# Altium PCB UV_Watch_1.PcbDoc (part 2 of 2)
Units mil, origin at the board's own origin, x right, y up, seen from the top; angles counter-clockwise.
Board outline 1500 x 1500 mil, 2 copper layers (Top Layer, Bottom Layer), stack 12.8 mil thick; 84 components, 41 nets, 258 pads, 64 vias.
Unrouted connection lines stored in the file: 1.
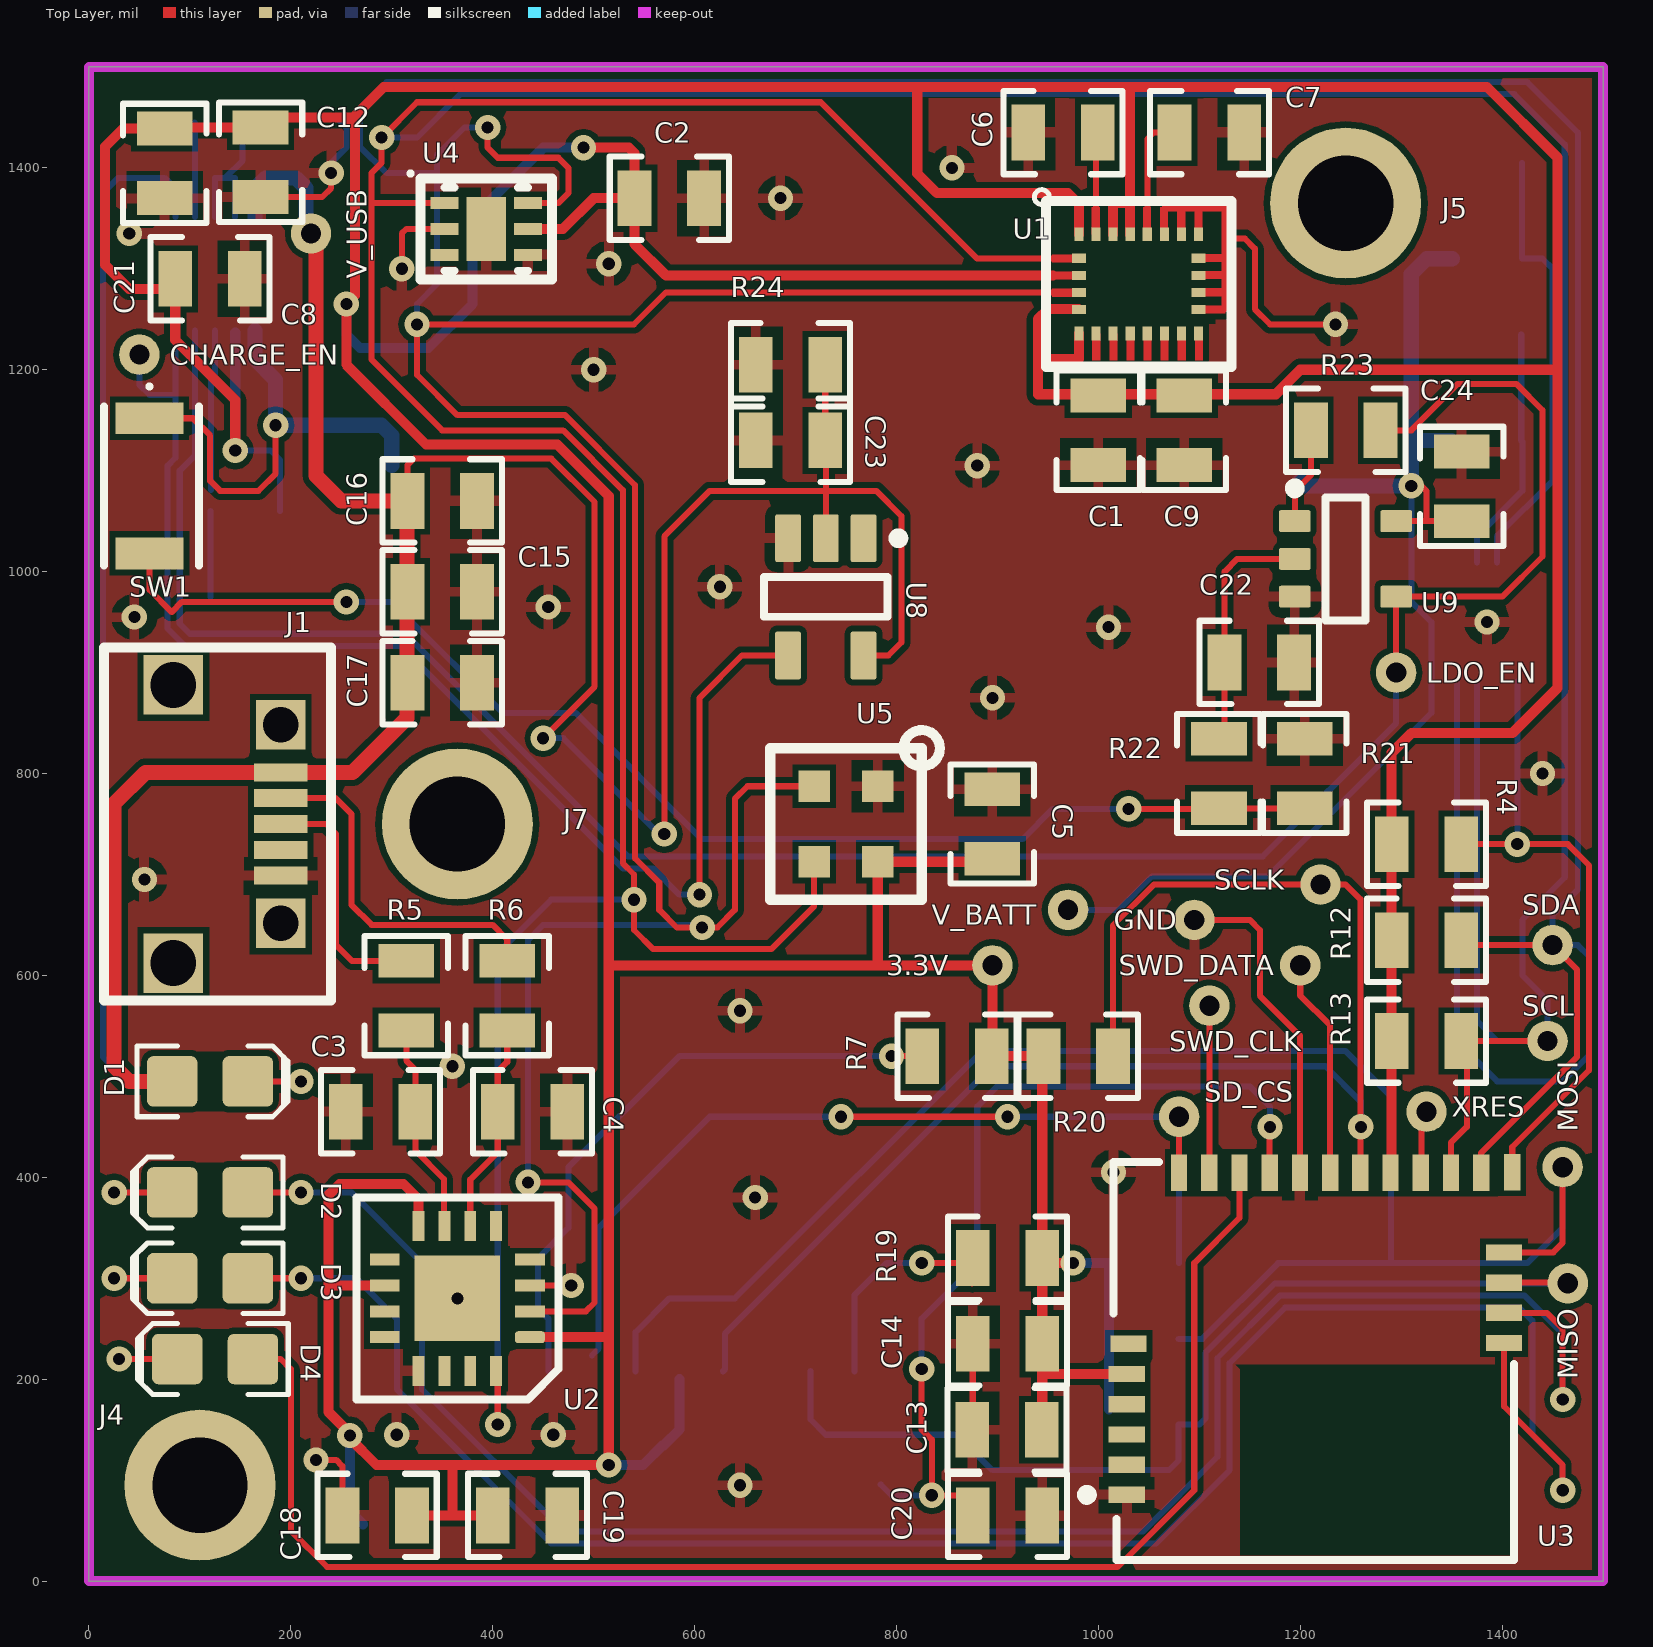
[diagram p0: Top Layer view]

## Part data (continued)
SW1: Contact Current Rating=50mA, Contact Resistance=100mR, Insulation Resistance=100MR, IP Rating="IP40,Dust Proof", Manufacturer=Omron, Manufacturer Part Number=B3U-3000P, Max Operating Temperature=70°C, Max Voltage Rating (DC)=12V, Min Operating Temperature=-25°C, Operating Force=1.59N, Package Quantity=1, Supplier Part Number 1=653-B3U-3000P, Actuator Length=0.7mm, ComponentLink1Description=https://datasheet.ciiva.com/1634/60838-1634400.pdf, ComponentLink1URL=https://datasheet.ciiva.com/1634/60838-1634400.pdf, ComponentLink2Description=https://datasheet.ciiva.com/2900/b3u-1110-2900035.pdf, ComponentLink2URL=https://datasheet.ciiva.com/2900/b3u-1110-2900035.pdf, ComponentLink3Description=https://datasheet.ciiva.com/2900/b3u-1110-2900036.pdf, ComponentLink3URL=https://datasheet.ciiva.com/2900/b3u-1110-2900036.pdf, ComponentLink4Description=https://datasheet.ciiva.com/2900/b3u-1110-2900037.pdf, ComponentLink4URL=https://datasheet.ciiva.com/2900/b3u-1110-2900037.pdf, ComponentLink5Description=https://datasheet.ciiva.com/1532/60838-1532682.pdf, ComponentLink5URL=https://datasheet.ciiva.com/1532/60838-1532682.pdf, ComponentLink6Description=https://datasheet.ciiva.com/16863/70176037-16863994.pdf, ComponentLink6URL=https://datasheet.ciiva.com/16863/70176037-16863994.pdf, ComponentLink7Description=https://datasheet.ciiva.com/14142/b3u-eng-datasheet-14142542.pdf, ComponentLink7URL=https://datasheet.ciiva.com/14142/b3u-eng-datasheet-14142542.pdf, ComponentLink8Description=https://datasheet.ciiva.com/30158/en-b3u-30158606.pdf, ComponentLink8URL=https://datasheet.ciiva.com/30158/en-b3u-30158606.pdf, Contact Material=Silver, Current Rating=50mA, Depth=3.2mm, Description 1="OMRON ELECTRONIC COMPONENTS         B3U-3000P            Tactile Switch, Non Illuminated, 1.59 N, 12 V, 50 mA, Solder, B3U Series", Electrical Life=100000Cycles, Illumination Type=Non-Illuminated,Illuminated, Lead Free="Lead Free", Length=4mm, Max Current Rating=50mA, Mechanical Life=100000Cycles, Mount="Surface Mount", Orientation="Right Angle", Packaging="Tape and Reel", Pricing 1="1=0.97, 10=0.961, 50=0.798, 100=0.725, 1000=0.526, 10000=0.445 (USD)", REACH SVHC=Unknown, Stock 1=4217, Supplier 1=Mouser, Switch Function=Off-Mom, Switch Travel=0.2mm, Termination=SMD/SMT, Throw Configuration=SPST, Voltage Rating (DC)=12V, Weight=0.022g
U1: Case/Package=LGA, Manufacturer=STMicroelectronics, Manufacturer Part Number=LSM9DS1TR, Max Operating Temperature=85°C, Max Supply Voltage=3.6V, Min Operating Temperature=-40°C, Min Supply Voltage=1.9V, Supplier Part Number 1=511-LSM9DS1TR, ComponentLink1Description=http://www.farnell.com/datasheets/2028150.pdf, ComponentLink1URL=http://www.farnell.com/datasheets/2028150.pdf, ComponentLink2Description=http://www.st.com/content/ccc/resource/technical/document/datasheet/1e/3f/2a/d6/25/eb/48/46/DM00103319.pdf/files/DM00103319.pdf/jcr:content/translations/en.DM00103319.pdf, ComponentLink2URL=http://www.st.com/content/ccc/resource/technical/document/datasheet/1e/3f/2a/d6/25/eb/48/46/DM00103319.pdf/files/DM00103319.pdf/jcr:content/translations/en.DM00103319.pdf, ComponentLink3Description=https://www.mouser.com/ds/2/389/lsm9ds1-955071.pdf, ComponentLink3URL=https://www.mouser.com/ds/2/389/lsm9ds1-955071.pdf, Description 1="STMICROELECTRONICS         LSM9DS1TR             MEMS Module, I2C/SPI, Tri-Axis Gyroscope, Tri-Axis Accelerometer, Tri-Axis Magnetometer, 1.9 V", Lead Free="Lead Free", Number of Pins=24, Output Type=SPI,I2C, Packaging="Cut Tape", Pricing 1="1=6.14, 10=5.55, 50=5.3, 100=4.6, 1000=3.49, 10000=3.1 (USD)", REACH SVHC="No SVHC", Sensor Type="Accelerometer,Gyroscope,Magnetometer,3 Axis", Stock 1=5520, Supplier 1=Mouser
U2: "USB to I2C Interface Chip, UHCI/OHCI/EHCI Compatible, USB 2.0 Compatible, -40 to +85 degC, 16-Pin QFN, Pb-Free, Tape and Reel", Case/Package=QFN, Manufacturer=FTDI, Max Operating Temperature=85°C, Min Operating Temperature=-40°C, Operating Supply Current=8mA, Operating Supply Voltage=5.5V, Package Quantity=5000, Supplier Part Number 1=768-1131-1-ND, ComponentLink1Description=https://datasheet.ciiva.com/14668/0900766b811020ab-14668386.pdf, ComponentLink1URL=https://datasheet.ciiva.com/14668/0900766b811020ab-14668386.pdf, ComponentLink2Description=https://datasheet.ciiva.com/1784/ft-x-series-1784572.pdf, ComponentLink2URL=https://datasheet.ciiva.com/1784/ft-x-series-1784572.pdf, ComponentLink3Description=https://datasheet.ciiva.com/1784/ft-x-series-1784573.pdf, ComponentLink3URL=https://datasheet.ciiva.com/1784/ft-x-series-1784573.pdf, ComponentLink4Description=https://datasheet.ciiva.com/1784/ft-x-series-1784574.pdf, ComponentLink4URL=https://datasheet.ciiva.com/1784/ft-x-series-1784574.pdf, Data Rate=12Mbps, Description 1="IC USB FS I2C 16QFN", Height=0.75mm, Interface=I2C,USB, Lead Free="Lead Free", Length=4mm, Manufacturer Part Number=FT201XQ-R, Mount="Surface Mount", Number of Pins=16, Packaging="Tape and Reel", Pricing 1="1=2.04, 25=1.97, 100=1.9, 250=1.71, 500=1.54, 1000=1.4806 (USD)", Stock 1=2248, Supplier 1=Digi-Key, Weight=0.002014oz, Width=4mm
U3: Case/Package=SMD/SMT, Current - Receiving=16.4mA, Current - Transmitting=15.6mA, Frequency=2.4GHz, Manufacturer=Cypress, Max Operating Temperature=85°C, Min Operating Temperature=-40°C, Operating Supply Voltage=5.5V, Supplier Part Number 1=428-3583-1-ND, ComponentLink1Description=http://www.cypress.com/file/230691/download, ComponentLink1URL=http://www.cypress.com/file/230691/download, Data Rate=1Mbps, Description 1="Bluetooth Class II 1.8V to 5.5V 1000Kbps 22-Pin SMD T/R", Interface=I2C,SPI,UART, Manufacturer Part Number=CYBLE-222014-01, Memory Size=32KB, Mount="Surface Mount", Packaging="Tape and Reel", Pricing 1="1=14.77, 10=13.367, 25=12.3112, 100=11.256, 250=10.5525 (USD)", Sensitivity=-91dBm, Stock 1=1017, Supplier 1=Digi-Key
U4: Manufacturer="Texas Instruments", Manufacturer Part Number=TMP116AIDRVT, Max Operating Temperature=150°C, Min Operating Temperature=-55°C, Supplier Part Number 1=296-46944-1-ND, Interface=I2C,SMBus,2-Wire, Pricing 1="1=4.01, 10=3.599, 100=2.9485 (USD)", Stock 1=995, Supplier 1=Digi-Key
U6: Case/Package="DFN EP", Manufacturer="Analog Devices / Linear Technology", Manufacturer Part Number=LTC4063EDD#PBF, Max Charge Current=1A, Max Input Voltage=8V, Max Operating Temperature=85°C, Min Input Voltage=4.3V, Min Operating Temperature=-40°C, Output Current=800uA, Output Voltage=4.2V, Package Quantity=121, Supplier Part Number 1=LTC4063EDD#PBF-ND, ComponentLink1Description=https://datasheet.ciiva.com/1139/1716146-1139992.pdf, ComponentLink1URL=https://datasheet.ciiva.com/1139/1716146-1139992.pdf, ComponentLink2Description=https://datasheet.ciiva.com/1145/79586-1145020.pdf, ComponentLink2URL=https://datasheet.ciiva.com/1145/79586-1145020.pdf, ComponentLink3Description=https://datasheet.ciiva.com/15114/getdatasheetpartid-366882-15114670.pdf, ComponentLink3URL=https://datasheet.ciiva.com/15114/getdatasheetpartid-366882-15114670.pdf, ComponentLink4Description=https://datasheet.ciiva.com/48696/001255656-da-01-en-ic-batt-chrgr-ltc4063edd-pbf-dfn-10-ltc-48696044.pdf, ComponentLink4URL=https://datasheet.ciiva.com/48696/001255656-da-01-en-ic-batt-chrgr-ltc4063edd-pbf-dfn-10-ltc-48696044.pdf, Description 1="LINEAR TECHNOLOGY         LTC4063EDD#PBF            IC, BATT CHARGER, W/MP LDO, 10DFN", Lead Free="Lead Free", Max Supply Voltage=8V, Min Supply Voltage=4.3V, Number of Cells=1, Number of Pins=10, Packaging=Rail/Tube, Pricing 1="1=4.36, 25=2.8928, 100=2.2848 (USD)", Radiation Hardening=No, REACH SVHC="No SVHC", Stock 1=576, Supplier 1=Digi-Key
U7: Manufacturer=Maxim, Manufacturer Part Number=MAX17043G+T, Max Operating Temperature=70°C, Min Operating Temperature=-20°C, Package Quantity=10000, Supplier Part Number 1=700-MAX17043G+T, ComponentLink1Description=https://datasheet.ciiva.com/1935/max17043-max17044-1935697.pdf, ComponentLink1URL=https://datasheet.ciiva.com/1935/max17043-max17044-1935697.pdf, Contact Plating=Tin,Matte, Description 1="IC 2-WIRE FG MODEL GAUGE LO BATT", Mount="Surface Mount", Number of Pins=8, Packaging="Tape and Reel", Pricing 1="1=3.67, 10=3.52, 50=1.85, 100=1.7, 1000=1.66, 10000=1.66 (USD)", Radiation Hardening=No, Stock 1=10717, Supplier 1=Mouser
U8: "SN74AHC1G04DBVR", Case/Package=SOT-23, High Level Output Current=-8mA, Low Level Output Current=8mA, Manufacturer="Texas Instruments", Max Operating Temperature=125°C, Max Supply Voltage=5.5V, Min Operating Temperature=-40°C, Min Supply Voltage=2V, Package Quantity=1, Quiescent Current=1uA, Supplier Part Number 1=595-SN74AHC1G04DBVR, ComponentLink1Description=https://datasheet.ciiva.com/4827/scls318q-100390-4827313.pdf, ComponentLink1URL=https://datasheet.ciiva.com/4827/scls318q-100390-4827313.pdf, ComponentLink2Description=https://datasheet.ciiva.com/1864/sn74ahc1g04-1864386.pdf, ComponentLink2URL=https://datasheet.ciiva.com/1864/sn74ahc1g04-1864386.pdf, ComponentLink3Description=https://datasheet.ciiva.com/14132/sn74ahc1g04-eng-tds-14132658.pdf, ComponentLink3URL=https://datasheet.ciiva.com/14132/sn74ahc1g04-eng-tds-14132658.pdf, ComponentLink4Description=https://datasheet.ciiva.com/1864/sn74ahc1g04-1864387.pdf, ComponentLink4URL=https://datasheet.ciiva.com/1864/sn74ahc1g04-1864387.pdf, ComponentLink5Description=https://datasheet.ciiva.com/1864/sn74ahc1g04-1864388.pdf, ComponentLink5URL=https://datasheet.ciiva.com/1864/sn74ahc1g04-1864388.pdf, ComponentLink6Description=https://datasheet.ciiva.com/15089/getdatasheetpartid-190014-15089365.pdf, ComponentLink6URL=https://datasheet.ciiva.com/15089/getdatasheetpartid-190014-15089365.pdf, ComponentLink7Description=https://datasheet.ciiva.com/46384/1882758-46384389.pdf, ComponentLink7URL=https://datasheet.ciiva.com/46384/1882758-46384389.pdf, ComponentLink8Description=https://datasheet.ciiva.com/46430/1834091-46430923.pdf, ComponentLink8URL=https://datasheet.ciiva.com/46430/1834091-46430923.pdf, ComponentLink9Description=https://datasheet.ciiva.com/4219/1511sn74ahc1g04-4219564.pdf, ComponentLink9URL=https://datasheet.ciiva.com/4219/1511sn74ahc1g04-4219564.pdf, ComponentLink10Description=https://datasheet.ciiva.com/7783/1759812-7783196.pdf, ComponentLink10URL=https://datasheet.ciiva.com/7783/1759812-7783196.pdf, ComponentLink11Description=https://datasheet.ciiva.com/16464/sn74ahc1g04-16464940.pdf, ComponentLink11URL=https://datasheet.ciiva.com/16464/sn74ahc1g04-16464940.pdf, ComponentLink12Description=https://datasheet.ciiva.com/7783/1759812-7783197.pdf, ComponentLink12URL=https://datasheet.ciiva.com/7783/1759812-7783197.pdf, ComponentLink13Description=https://datasheet.ciiva.com/27052/1384368-27052143.pdf, ComponentLink13URL=https://datasheet.ciiva.com/27052/1384368-27052143.pdf, ComponentLink14Description=https://datasheet.ciiva.com/48703/001074492-da-01-en-ic-single-i-sn74ahc1g04dbvr-sot-23-5-tid-48703786.pdf, ComponentLink14URL=https://datasheet.ciiva.com/48703/001074492-da-01-en-ic-single-i-sn74ahc1g04dbvr-sot-23-5-tid-48703786.pdf, Contact Plating=Tin,Matte, Description 1="IC SINGLE INVERTER GATE SOT23-5", Height=1.15mm, Lead Free="Lead Free", Length=2.9mm, Logic Function=Buffer,Inverter,Inverting, Manufacturer Part Number=SN74AHC1G04DBVR, Max Output Current=8mA, Mount="Surface Mount", Number of Bits=1, Number of Circuits=1, Number of Elements=1, Number of Gates=1, Number of Inputs=1, Number of Pins=5, Output Current=8mA, Packaging="Tape and Reel", Pricing 1="1=0.43, 10=0.289, 50=0.289, 100=0.137, 1000=0.106, 10000=0.08 (USD)", Propagation Delay=7.5ns, Radiation Hardening=No, REACH SVHC="No SVHC", Schmitt Trigger Input=No, Stock 1=27929, Supplier 1=Mouser, Termination=SMD/SMT, Turn-On Delay Time=12ns, Weight=0.000557oz, Width=1.6mm
U9: Case/Package=SOT-23, Frequency=280MHz, High Level Output Current=-4mA, Low Level Output Current=4mA, Manufacturer="Texas Instruments", Manufacturer Part Number=SN74AUP1G80DBVR, Max Operating Temperature=85°C, Max Supply Voltage=3.6V, Min Operating Temperature=-40°C, Min Supply Voltage=800mV, Package Quantity=3000, Supplier Part Number 1=595-SN74AUP1G80DBVR, Clock Edge Trigger Type="Positive Edge", ComponentLink1Description=https://datasheet.ciiva.com/15091/getdatasheetpartid-194395-15091600.pdf, ComponentLink1URL=https://datasheet.ciiva.com/15091/getdatasheetpartid-194395-15091600.pdf, ComponentLink2Description=https://datasheet.ciiva.com/1854/sn74aup1g80-1854806.pdf, ComponentLink2URL=https://datasheet.ciiva.com/1854/sn74aup1g80-1854806.pdf, ComponentLink3Description=https://datasheet.ciiva.com/1854/sn74aup1g80-1854807.pdf, ComponentLink3URL=https://datasheet.ciiva.com/1854/sn74aup1g80-1854807.pdf, ComponentLink4Description=https://datasheet.ciiva.com/1854/sn74aup1g80-1854808.pdf, ComponentLink4URL=https://datasheet.ciiva.com/1854/sn74aup1g80-1854808.pdf, ComponentLink5Description=https://datasheet.ciiva.com/14313/sces593e-14313482.pdf, ComponentLink5URL=https://datasheet.ciiva.com/14313/sces593e-14313482.pdf, ComponentLink6Description=https://datasheet.ciiva.com/14292/sn74aup1g80-14292862.pdf, ComponentLink6URL=https://datasheet.ciiva.com/14292/sn74aup1g80-14292862.pdf, Description 1="IC D-TYPE POS TRG SNGL SOT23-5", Lead Free="Lead Free", Logic Function=D-Type, Mount="Surface Mount", Number of Bits=1, Number of Bits per Element=1, Number of Circuits=1, Number of Elements=1, Number of Input Lines=1, Number of Output Lines=1, Number of Outputs=1, Number of Pins=5, Packaging="Tape and Reel", Polarity=Inverting, Pricing 1="1=0.35, 10=0.266, 50=0.266, 100=0.144, 1000=0.108, 10000=0.087 (USD)", Propagation Delay=17.7ns, Radiation Hardening=No, REACH SVHC="No SVHC", Stock 1=3731, Supplier 1=Mouser, Turn-On Delay Time=3.1ns, Weight=0.000395oz

## Via types
v1: diameter 25, hole 12, Top Layer to Bottom Layer, 64 vias

## Nets (pads, with @x,y where several pads share a name; then routed paths per layer and width w, separated by ;. In a path a pad name is that pad's centre, name@x,y a point inside that pad or via, vN(x,y) a via of type N, cw(c..) or ccw(c..) an arc to the next point about the centre after c; other vN are vias at no path point)
3.3V: 3.3V.1 C1.1 C2.1 C5.2 C8.1 C9.1 C12.1 C13.1 C14.1 C18.1 C19.2 C21.2 J3.4 J3.10 R4.1 R7.1 R8.1 R9.2 R12.2 R13.1 R14.1 R18.1 R19.1 R20.1 U1.1 U1.3 U1.5 U1.6 U1.22 U1.23 U2.1 U2.8 U2.10 U3.5 U3.14 U4.5 U5.4 U6.2 | length 9560.3
  Top Layer w6: 955,1293.46 U1.3
  Top Layer w10: v1(145,1120) 145,1170 85.55,1229.45 85.55,1280 40,1280 16,1304 16,1421 33.9,1438.9 C21.2 76.1,1440 C12.1 180,1450 258.5,1450 258.5,1446.5 ; U2.10 237.2,292.8 ; C18.1 360,65 ; U2.8 326.61,378.39 311.61,393.39 248.39,393.39 237.2,382.2 237.2,292.8 ; C19.2 360,65 ; U4.5 469.41,1339.41 500,1370 C2.1 ; U2.1 515,241.61 ; v1(490,1420) 535,1420 540.55,1414.45 C2.1 ; C5.2@885,715.55 882.05,712.6 U5.4 781.5,610 ; 940.75,1210.75 980.75,1210.75 U1.6 ; R19.1@943.9,295 944.45,294.45 C14.1 944.45,205 ; C13.1@944.45,155 944.45,205 ; 955,1293.46 571.54,1293.46 540.55,1324.45 C2.1 ; v1(975,315) 944.45,315 R19.1 944.45,518.9 R20.1 895,520 3.3V.1 781.5,610 ; U1.5@980.35,1260 950,1260 940,1250 940,1175.75 1175.75,1175.75 1200,1200 1455,1200 ; U1.1 980.75,1364.25 970,1375 840,1375 820.55,1394.45 820.55,1480 ; U1.23 1014.61,1364.61 1015,1365 1031.54,1365 ; U3.5 944.59,205.14 944.45,205 ; U1.22 1031.54,1365 ; U3.14 1290.55,405.69 R13.1 R12.2 R4.1 1290.55,820.55 1310,840 1410,840 1455,885 1455,1200 ; 237.2,292.8 237.2,167.8 258.5,146.5 v1(258.5,144.21) 258.5,141.5 285,115 360,115 ; 258.5,1446.5 292,1480 820.55,1480 ; 258.5,1446.5 263.5,1441.5 263.5,1273.5 v1(255,1265) 255,1205 334,1126 464,1126 515,1075 515,610 ; 360,65 360,115 ; 360,115 v1(515,115) 515,241.61 ; 515,241.61 515,610 ; 515,610 781.5,610 ; 820.55,1480 1031.54,1480 ; 1031.54,1365 1031.54,1480 ; 1031.54,1480 1385,1480 1455,1410 1455,1200
  Bottom Layer w6: v1(145,1120) 180,1120 189.45,1110.55 R9.2
  Bottom Layer w10: v1(145,1120) U6.2@145,1236.84 ; v1(255,1265) 255,1235 268.5,1221.5 336.5,1221.5 380,1265 380,1350 450,1420 v1(490,1420) ; v1(258.5,144.21) 258.5,69.41 J3.10 ; v1(515,115) 549,115 569,135 569.5,134.5 585,150 J3.4 ; v1(975,315) 1011.1,315 1010.55,314.45 R14.1 R18.1@1010.55,170
BUTTON: C22.2 R22.2 U9.2 | length 242.7
  Top Layer w6: R22.2 1125,840 C22.2 1125,1000 1137.6,1012.6 U9.2
CHARGE_EN: CHARGE_EN.1 U6.5 U8.4 | length 1294.4
  Top Layer w6: v1(605,680) 605,875 646.93,916.93 U8.4
  Bottom Layer w6: CHARGE_EN.1 50,1185 60,1175 85.63,1175 ; U6.5 85.63,1175 ; v1@595,680 585,680 559,706 529,706 308.56,926.44 95.12,926.44 78,943.56 78,1104.97 85.63,1112.6 85.63,1175
GND: C1.2 C2.2 C3.1 C4.1 C5.1 C6.2 C7.2 C8.2 C9.2 C10.2 C11.2 C12.2 C13.2 C14.2 C15.2 C16.1 C17.1 C18.2 C19.1 C20.2 C21.1 C22.1 C23.1 C24.2 C25.2 GND.1 J1.5 J2.2 J3.6 R10.2 R11.2 R15.1 R16.1 R17.1 R21.2 R24.2 U1.14 U1.15 U1.16 U1.17 U1.18 U1.19 U1.20 U2.3 U2.13 U2.17 U3.1 U3.11 U4.2 U4.4 U4.7 U5.1 U6.11 U7.1 U7.4 U7.6 U7.9 U8.3 U9.3 | length 1305.3
  Top Layer w6: C12.2 231.1,1371.1 240,1380 v1(240,1395) ; v1(225,120) 245,120 251.1,113.9 C18.2 ; v1(310,1300) 310,1335 314.41,1339.41 U4.2 ; v1(365,280) U2.17@377.8,292.8 ; U2.3 v1(477.8,292.8) ; C13.2@875.55,155 C14.2@875.55,225 ; U1.20 1065.39,1360 1082.32,1360 ; U1.19 1082.32,1360 ; U1.14 1125,1259.61 1125,1276.54 ; U1.15 1125,1276.54 ; U1.16 1125,1293.46 ; U1.17 1125,1310.39 ; U1.18 1099.25,1360 ; GND.1@1100,655 1150,655 1160,645 1160,580 1199.65,540.35 U3.11 ; v1(1235,1245) 1170,1245 1155,1260 1155,1320 1145,1330 1125,1330 ; 1082.32,1360 1099.25,1360 ; 1099.25,1360 1125,1360 1125,1330 ; 1125,1276.54 1125,1293.46 ; 1125,1293.46 1125,1310.39 ; 1125,1310.39 1125,1330
  Bottom Layer w6: R11.2@221.17,1450 245,1450 255,1440 255,1420 240,1405 v1(240,1395)
  other v1: 645,95 305,145 460,145 660,380 1015,405 360,510 645,565 55,695 1440,800 895,875 1010,945 1385,950 45,955 455,965 625,985 880,1105 500,1200 515,1305 40,1335 685,1370 855,1400
LDO_EN: LDO_EN.1 R23.2 U6.4 U9.4 | length 2273.9
  Top Layer w6: R23.2 1310,1140 1356,1186 1414,1186 1440,1160 1440,1015 1400.2,975.2 U9.4 LDO_EN.1
  Bottom Layer w6: U6.4 105.32,1115.32 90,1100 90,948.53 100.09,938.44 313.53,938.44 533.97,718 1163,718 1295,850 LDO_EN.1
LED_BLE: D4.A U3.9 | length 1476.4
  Top Layer w6: D4.A 190,220 200,210 200,50 236,14 1019,14 1095,90 1095,315 1139.8,359.8 U3.9 U3.9@1140,404.74
LED_IND: D2.A U3.21 | length 1884.5
  Top Layer w6: D2.A v1(210,385) ; U3.21 1444.23,265.77 1460,250 v1(1460,180)
  Bottom Layer w6: v1(210,385) 260,385 330,315 330,190 470.73,49.27 1044.27,49.27 1118,123 1118,221.03 1179.97,283 1422,283 1460,245 v1(1460,180)
LED_LOW_BATT: D3.A U3.22 | length 1937
  Top Layer w6: D3.A v1(210,300) ; U3.22 1401.81,173.19 1460,115 v1(1460,90)
  Bottom Layer w6: v1(210,300) 265,300 305,260 305,190 457.73,37.27 1057.27,37.27 1130,110 1130,216.06 1184.94,271 1417.03,271 1430,258.03 1430,145 1460,115 v1(1460,90)
LOW_BATT_ALERT: R4.2 U3.18 U7.5 | length 631.9
  Top Layer w6: R4.2 v1(1415,730) 1465,730 1486,709 1486,506 1410,430 U3.18
  Bottom Layer w6: U7.5 1415,890.47 v1(1415,730)
MISO: J3.7 MISO.1 R18.2 U3.20 | length 996.6
  Top Layer w6: U3.20 MISO.1@1454.31,295.69
  Bottom Layer w6: J3.7 714.92,160.08 730,145 860,145 895,110 1070,110 1079.45,119.45 R18.2 1100,155 1106,161 1106,226 1175,295 MISO.1@1455,295
MOSI: J3.3 MOSI.1 R14.2 U3.19 | length 1709.2
  Top Layer w6: U3.19 1450.61,325.61 1460,335 MOSI.1
  Bottom Layer w6: J3.3 541.69,246.69 575,280 640,280 885,525 1245,525 1290,480 1290,315 ; R14.2 1103.03,240 1178.03,315 1290,315 ; MOSI.1 1460,350 1425,315 1290,315
NetC3_2: C3.2 R5.2 U2.7 | length 209.1
  Top Layer w6: R5.2 314.45,515.55 323.35,506.65 C3.2 323.35,426.65 351.65,398.35 U2.7@351.65,351.85
NetC4_2: C4.2 R6.2 U2.6 | length 208.9
  Top Layer w6: U2.6 377.8,397.8 405,425 C4.2 405,505 414.45,514.45 R6.2
NetC6_1: C6.1 U1.24 | length 86.5
  Top Layer w6: U1.24 997.68,1418.23 C6.1@999.45,1420
NetC7_1: C7.1 U1.21 | length 129
  Top Layer w6: U1.21 1048.46,1428.46 1055,1435 C7.1 C7.1@1080.55,1435
NetC10_1: C10.1 R3.1 U7.3 | length 443.5
  Bottom Layer w6: U7.3 1394.84,1035 1450,1090.16 1450,1300 1440,1310 R3.1 C10.1
NetC11_1: C11.1 R2.1 U7.2 | length 245
  Bottom Layer w6: U7.2 1375.16,1035.16 1420,1080 1420,1128.9 1418.9,1130 C11.1@1418.9,1235
NetC25_1: C25.1 U6.7 | length 94.3
  Bottom Layer w6: C25.1 105.32,1444.13 U6.7
NetD1_K: D1.K R1.1 | length 105.6
  Top Layer w6: D1.K v1(210,495)
  Bottom Layer w6: R1.1@156.95,495 v1(210,495)
NetD2_K: D2.K R15.2 | length 128.1
  Top Layer w6: v1(25,385) D2.K D2.K@87.5,385
  Bottom Layer w6: v1(25,385) R15.2 R15.2@90.55,385
NetD3_K: D3.K R16.2 | length 128.1
  Top Layer w6: v1(25,300) D3.K D3.K@87.5,300
  Bottom Layer w6: v1(25,300) R16.2 R16.2@90.55,300
NetD4_K: D4.K R17.2 | length 123.1
  Top Layer w6: v1(30,220) D4.K D4.K@92.5,220
  Bottom Layer w6: v1(30,220) R17.2 R17.2@90.55,220
NetJ1_2: J1.2 R6.1 | length 356.3
  Top Layer w6: J1.2 244.41,775.59 260,760 260,670 280,650 400,650 414.45,635.55 R6.1
NetJ1_3: J1.3 R5.1 | length 245
  Top Layer w6: J1.3 235,750 245,740 245,630 260.55,614.45 R5.1
NetJ3_1: J3.1 R7.2 | length 614.8
  Top Layer w6: v1(795,520) R7.2
  Bottom Layer w6: J3.1 455.08,259.92 445,270 445,320 475,350 475,410 585,520 v1(795,520)
NetJ3_8: J3.8 R19.2 | length 225.3
  Top Layer w6: v1(825,315) 875,315 R19.2@875,295
  Bottom Layer w6: J3.8 758.23,283.23 790,315 v1(825,315)
NetR1_2: R1.2 U6.6 | length 1033
  Bottom Layer w6: R1.2@70.55,495 37.98,495 14,518.98 14,1375 29,1390 75,1390 85.63,1379.37 U6.6
NetR9_1: R9.1 R10.1 U6.3 | length 244.6
  Bottom Layer w6: R10.1 R9.1 ; R9.1@121,1081 121,1191 125,1195 U6.3
NetR11_1: R11.1 U6.8 U6.9 | length 164.4
  Bottom Layer w6: U6.8 125,1390 135.19,1390 ; U6.9 144.69,1389.69 144.37,1390 135.19,1390 ; R11.1@152.27,1450 152.27,1407.07 135.19,1390
NetR21_1: R21.1 R22.1 SW1.2 | length 1303.9
  Top Layer w6: SW1.2 60,982.02 82.09,959.93 92.17,970 v1(255,970) ; v1(1030,765) 1118.9,765 R22.1 R21.1
  Bottom Layer w6: v1(255,970) 299.86,970 309.93,959.93 310,960 410,860 482.3,860 607.3,735 925,735 955,765 v1(1030,765)
NetR23_1: R23.1 U9.1 | length 96.6
  Top Layer w6: U9.1 1194.61,1079.61 1210.55,1095.55 R23.1
SCL: R13.2 SCL.1 U1.2 U2.16 U3.16 U4.1 U5.3 U7.7 | length 5486.3
  Top Layer w6: U4.1 280,1365 ; U2.16 405,206.54 v1(405,155) ; U5.3 718.5,668.5 676,626 559,626 540,645 v1(540,675) 540,700 529,711 529,1080.8 469.8,1140 350,1140 280,1210 280,1365 ; U1.2 879.61,1310.39 725,1465 325,1465 v1(290,1430) 290,1405 280,1395 280,1365 ; U3.16 1349.25,434.25 1365,450 1365,525.55 1374.45,535 SCL.1
  Bottom Layer w6: v1(290,1430) 325,1430 368,1473 1412,1473 1462,1423 1462,697 1420,655 1420,600 1445,575 SCL.1 1395,535 1375.16,554.84 U7.7 ; v1(405,155) 405,621.97 458.03,675 v1(540,675)
SCLK: J3.5 R20.2 SCLK.1 U3.13 | length 1485.3
  Top Layer w6: R20.2 1014.45,649.45 1055,690 SCLK.1 1245,690 1259.49,675.51 U3.13
  Bottom Layer w6: J3.5 630,209.57 630,245 895,510 1225,510 1260,475 v1(1260,450)
SD_CS: J3.2 R8.2 SD_CS.1 U3.7 | length 950.2
  Top Layer w6: v1(745,460) v1(910,460) ; U3.7 SD_CS.1 SD_CS.1
  Bottom Layer w6: J3.2 505,230.24 505,350 615,460 v1(745,460) ; v1(910,460) SD_CS.1 R8.2@1080,315
SD_FLAG: C20.1 J3.9 U3.10 | length 899.1
  Top Layer w6: v1(825,210) 825,150 835,140 v1(835,85) C20.1@875.55,85 ; U3.10 1169.72,459.72 1170,459.45 v1(1170,450)
  Bottom Layer w6: J3.9 795.08,85 v1(835,85) ; v1(825,210) 825,260 880,315 880,470 900,490 1150,490 1170,470 v1(1170,450)
SDA: R12.1 SDA.1 U1.4 U2.2 U3.17 U4.6 U5.2 U7.8 | length 5964.3
  Top Layer w6: v1(395,1440) 395,1420 405,1410 465,1410 475,1400 475,1375 465,1365 U4.6 ; v1(435,395) 475,395 501,369 501,276 492.2,267.2 U2.2 ; U5.2 652.4,787.4 640,775 640,665 622.5,647.5 v1(607.5,647.5) 582.5,647.5 565,665 565,691.97 541,715.97 541,1085.77 471.77,1155 365,1155 325,1195 v1(325,1245) 540,1245 571.54,1276.54 U1.4 ; R12.1@1359.45,625 1364.45,630 SDA.1 1474,606 1474,519 1379.17,424.17 U3.17
  Bottom Layer w6: v1(325,1245) 325,1265 345,1285 345,1395 ; v1(395,1440) 371.97,1440 345,1413.03 345,1395 ; v1(435,395) 435,635 450,650 605,650 v1(607.5,647.5) ; U7.8 1355.47,534.53 1395,495 1460,495 1486,521 1486,619 1475,630 SDA.1 1450,660 1475,685 1475,1435 1425,1485 295,1485 268.5,1458.5 268.5,1421.09 294.59,1395 345,1395
SWD_CLK: SWD_CLK.1 U3.8 | length 165.5
  Top Layer w6: U3.8 1109.88,569.88 SWD_CLK.1
SWD_DATA: SWD_DATA.1 U3.12 | length 217.7
  Top Layer w6: SWD_DATA.1 1200,580 1229.57,550.43 U3.12
V_BATT: C24.1 J2.1 R2.2 R3.2 SW1.1 U6.1 U9.5 V_BATT.1 | length 1682.7
  Top Layer w6: SW1.1 103.07,1151.93 120,1135 120,1090 130,1080 167.98,1080 185,1097.02 v1(185,1145) ; U9.5 1325,1050 ; v1(1310,1085) 1320,1085 1325,1080 1325,1050 ; C24.1 1325,1050
  Bottom Layer w6: V_BATT.1 1020,665 1053,698 1168,698 1330,860 1330,950 1310,970 v1(1310,1085)
  Bottom Layer w15: U6.1 164.37,1210.63 185,1190 v1(185,1145) 290,1145 300,1135 J2.1@300,1105 ; J2.1@1200,1090 1205,1085 v1(1310,1085) 1310,1130 ; R2.2@1350,1130 1310,1130 ; R3.2 1325,1310 1310,1295 1310,1130
V_USB: C15.1 C16.2 C17.2 C23.2 D1.A J1.1 R24.1 U6.10 U8.2 U8.5 V_USB.1 | length 2882.4
  Top Layer w6: C16.2 315.55,1105.55 322,1112 458,1112 501,1069 501,886 v1(450,835) ; v1(570,740) 570,1035 615,1080 730,1080 ; R24.1 729.45,1130.55 730,1130 730,1080 ; U8.2 730,1080 ; U8.5 791.93,916.93 805,930 805,1055 780,1080 730,1080
  Top Layer w15: D1.A 40,495 25,510 25,770 56.18,801.18 J1.1 261.18,801.18 315,855 C16.2@315,1070 ; V_USB.1@225,1335 225,1095 250,1070 C16.2@315,1070 ; C16.2 C16.2@315,1070
  Bottom Layer w6: v1(450,835) 470,835 565,740 v1(570,740)
  Bottom Layer w15: U6.10 164.37,1379.37 175,1390 205,1390 215,1380 V_USB.1@215,1345
XRES: U3.15 XRES.1 | length 55.7
  Top Layer w6: U3.15 1320,405.22 XRES.1@1320,460
pads on no net: D1.0 D2.0 D3.0 D4.0 J1.4 J1.15 J1.16 J1.18 J3.11 J3.12 J4.11 J5.11 J7.11 U1.7 U1.8 U1.9 U1.10 U1.11 U1.12 U1.13 U2.4 U2.5 U2.9 U2.11 U2.12 U2.14 U2.15 U3.2 U3.3 U3.4 U3.6 U4.3 U8.1

## Polygon pours and split planes (outlines as drawn)
GND on Bottom Layer "GND_BOTTOM" (solid, remove dead copper, pour order 4): 0,0 0,1500 1495,1500 1500,1500 1500,0
GND on Top Layer "GND_TOP" (solid, remove dead copper, pour order 0): 0,0 0,1500 1500,1500 1500,1495 1500,0

## Keep-outs
Keep-Out Layer:
  the board outline again, w10

## Silkscreen, mask and mechanical layers (free items; w line width, h text height)
Mechanical 3:
  the board outline again, w10